# EAGLE board low_level_contoller_board (EAGLE 9.0.0)
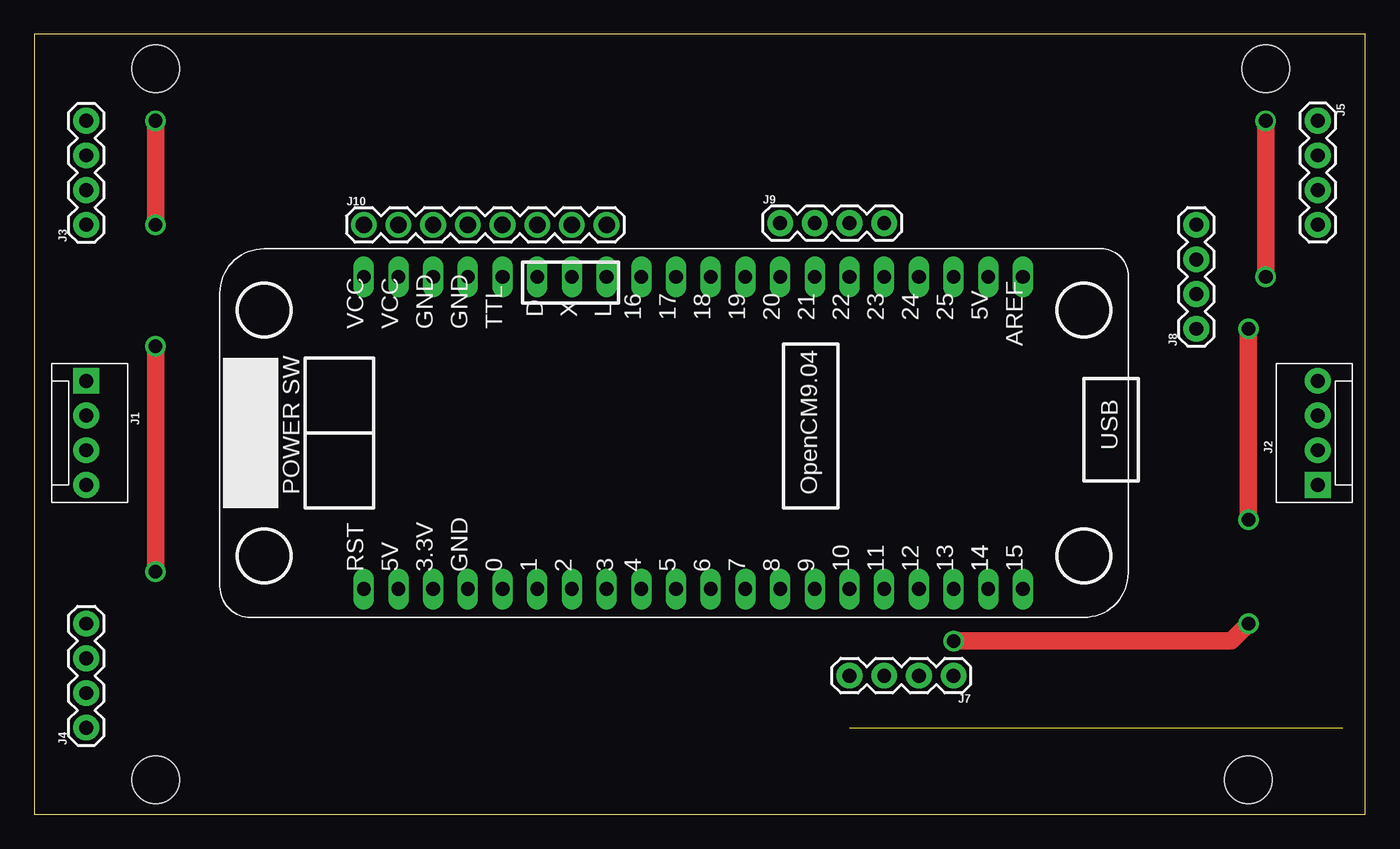
[diagram p0: board, top side]
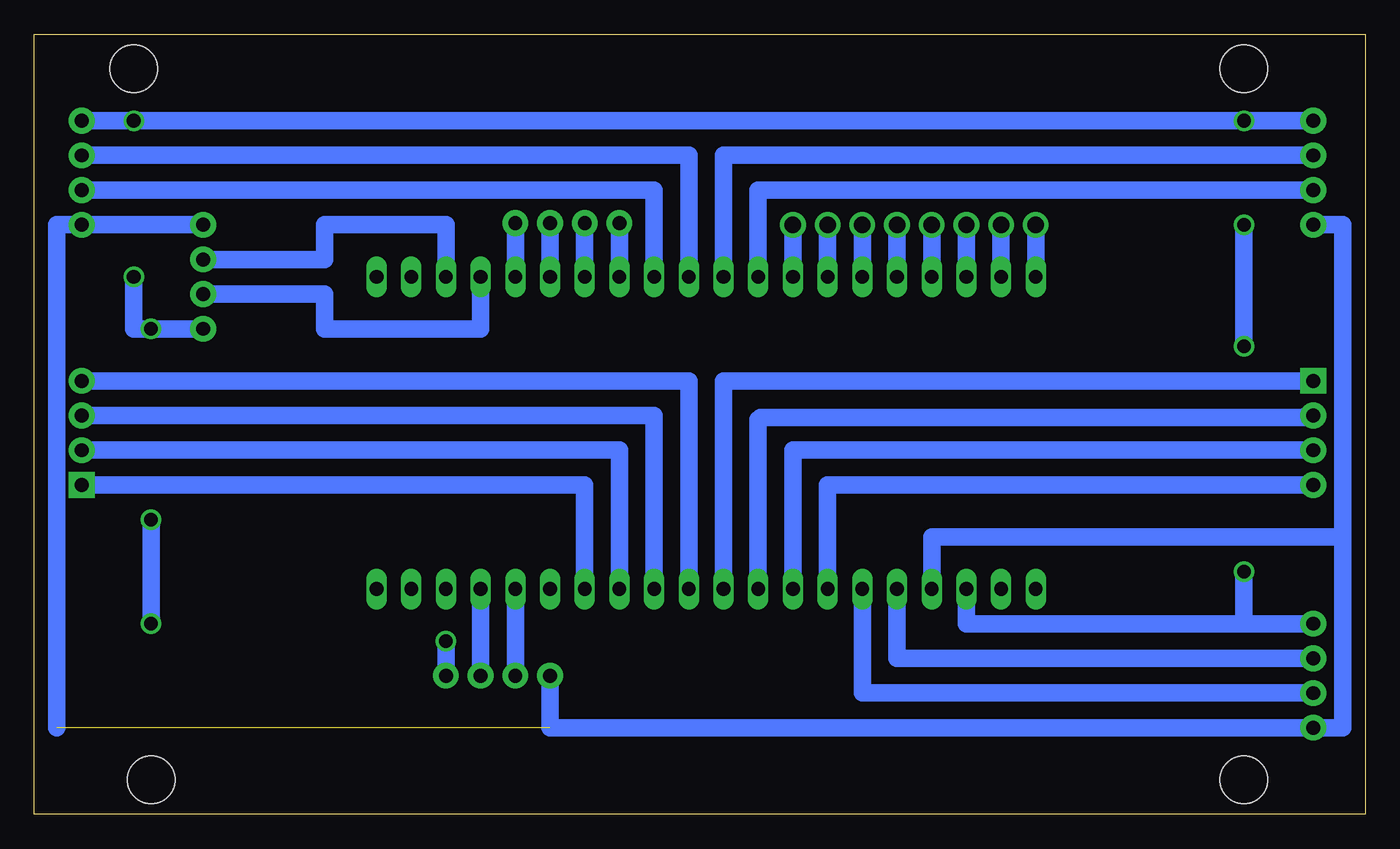
[diagram p1: board, bottom side, seen from below]

Size 97.46 x 57.14 mm. Coordinates in mm from the lower left corner, seen from the top.
Outline: 0,0 97.46,0 97.46,57.14 0,57.14 0,0
Copper layers (1*16): Top 0.035mm / dielectric 1.5mm / Bottom 0.035mm
Design rules "default": minimum track width 6mil, minimum drill 0.35mm, track to track 6mil, track to pad 6mil, pad to pad 6mil, via to via 6mil, smd to smd 6mil, copper to edge 40mil, drill to drill 6mil, minimum pad ring 10mil, minimum via ring 8mil, stop-mask expansion 4mil, vias tented up to drill 0mil, thermal gap 10mil
Holes 3.5 mm at 8.89,2.54 88.9,2.54 90.17,54.61 8.89,54.61

## Footprints (pad centres in the part's own frame; a part is rotated, then mirrored left to right if it is on the bottom)
MOLEX-1X4 = drill 1.016 pad 1.88 square: 1 0,0 | drill 1.016 pad 1.88: 2 2.54,0; 3 5.08,0; 4 7.62,0
1X04 = drill 1.016 pad 1.88: 1 0,0; 2 2.54,0; 3 5.08,0; 4 7.62,0
1X08 = drill 1.2 pad 1.88: 1 0,0; 2 2.54,0; 3 5.08,0; 4 7.62,0; 5 10.16,0; 6 12.7,0; 7 15.24,0; 8 17.78,0
OPENCM9.04 = drill 1 long: 0 -11.43,12.7; 1 -11.43,10.16; 2 -11.43,7.62; 3 -11.43,5.08; 3.3V -11.43,17.78; 4 -11.43,2.54; 5 -11.43,0; 5V -11.43,20.32; 5V2 11.43,-22.86; 6 -11.43,-2.54; 7 -11.43,-5.08; 8 -11.43,-7.62; 9 -11.43,-10.16; 10 -11.43,-12.7; 11 -11.43,-15.24; 12 -11.43,-17.78; 13 -11.43,-20.32; 14 -11.43,-22.86; 15 -11.43,-25.4; 16 11.43,2.54; 17 11.43,0; 18 11.43,-2.54; 19 11.43,-5.08; 20 11.43,-7.62; 21 11.43,-10.16; 22 11.43,-12.7; 23 11.43,-15.24; 24 11.43,-17.78; 25 11.43,-20.32; AREF 11.43,-25.4; D 11.43,10.16; GND -11.43,15.24; GND2 11.43,17.78; GND3 11.43,15.24; L 11.43,5.08; RST -11.43,22.86; TTL 11.43,12.7; VCC 11.43,22.86; VCC2 11.43,20.32; X 11.43,7.62

## Placement (x,y rotation side)
J1  [MOLEX-1X4]  3.81,31.75 270 top
J2  [MOLEX-1X4]  93.98,24.13 90 top
J3  [1X04]  3.81,43.18 90 top
J4  [1X04]  3.81,6.35 90 top
J5  [1X04]  93.98,50.8 270 top
J7  [1X04]  67.31,10.16 180 top
J8  [1X04]  85.09,35.56 90 top
J9  [1X04]  54.61,43.31 0 top
J10  [1X08]  24.13,43.18 0 top
U$1  OPENCM9.04  [OPENCM9.04]  46.99,27.94 90 top

## Library data of the parts
J1 J2 = SparkFun-Connectors; PROD_ID: CONN-08186; SF_ID: PRT-08231
J3-J5 J7-J9 = SparkFun-Connectors; PROD_ID: CONN-09696
J10 = SparkFun-Connectors; PROD_ID: CONN-08438
U$1 = OpenCM9.04

## Nets
+3V3: J3.4 J4.4 J5.1 J7.1 J8.1 U$1.3.3V
GND: J3.1 J4.1 J5.4 J7.4 J8.4 U$1.GND
N$1: J1.4 U$1.2
N$2: J1.3 U$1.3
N$3: J1.2 U$1.4
N$4: J1.1 U$1.5
N$5: J2.4 U$1.6
N$6: J2.3 U$1.7
N$7: J2.2 U$1.8
N$8: J2.1 U$1.9
N$9: J3.2 U$1.16
N$10: J3.3 U$1.17
N$11: J5.2 U$1.18
N$12: J5.3 U$1.19
N$13: J4.3 U$1.0
N$14: J4.2 U$1.1
N$17: J7.3 U$1.11
N$18: J7.2 U$1.12
N$19: J9.1 U$1.20
N$20: J8.3 U$1.25
N$21: J8.2 U$1.24
N$22: J9.2 U$1.21
N$23: J9.3 U$1.22
N$24: J9.4 U$1.23
N$25: J10.1 U$1.VCC
N$26: J10.2 U$1.VCC2
N$27: J10.3 U$1.GND2
N$28: J10.4 U$1.GND3
N$29: J10.5 U$1.TTL
N$30: J10.6 U$1.D
N$31: J10.7 U$1.X
N$32: J10.8 U$1.L

## Tracks (layer width: path | path; a pad name or v marks a point on that pad's centre or on a via)
+3V3  (via drill 1)
  Top 1.27: v8.89,50.8 v8.89,43.18 | v8.89,34.29 v8.89,17.78 | v88.9,35.56 v88.9,21.59 | v88.9,13.97 87.63,12.7 v67.31,12.7 | v90.17,50.8 v90.17,39.37
  Bottom 1.27: J3.4 v8.89,50.8 v90.17,50.8 J5.1 | v8.89,43.18 v8.89,34.29 | J8.1 v88.9,35.56 90.17,35.56 v90.17,39.37 | J7.1 v67.31,12.7 | v88.9,13.97 v88.9,21.59 | U$1.3.3V 29.21,13.97 8.89,13.97 | J4.4 8.89,13.97 | v8.89,17.78 8.89,13.97
GND  (1 unrouted)
  Bottom 1.27: 95.81,6.35 95.81,43.18 J5.4 J8.4 | J3.1 1.65,43.18 1.65,20.32 | 1.65,20.32 1.65,6.35 J4.1 59.69,6.35 J7.4 | U$1.GND 31.75,20.32 1.65,20.32
N$1
  Bottom 1.27: U$1.2 39.37,24.13 J1.4
N$2
  Bottom 1.27: J1.3 41.91,26.67 U$1.3
N$3
  Bottom 1.27: J1.2 4.34,29.21 4.49,29.06 44.3,29.06 44.45,28.91 U$1.4
N$4
  Bottom 1.27: J1.1 46.99,31.75 U$1.5
N$5
  Bottom 1.27: U$1.6 49.53,31.75 J2.4
N$6
  Bottom 1.27: U$1.7 52.07,29.21 J2.3
N$7
  Bottom 1.27: U$1.8 54.61,26.67 J2.2
N$8
  Bottom 1.27: U$1.9 57.15,24.13 J2.1
N$9
  Bottom 1.27: U$1.16 44.45,45.72 J3.2
N$10
  Bottom 1.27: U$1.17 46.99,48.26 J3.3
N$11
  Bottom 1.27: U$1.18 49.53,48.26 J5.2
N$12
  Bottom 1.27: J5.3 52.07,45.72 U$1.19
N$13
  Bottom 1.27: J4.3 34.29,11.43 U$1.0
N$14
  Bottom 1.27: U$1.1 36.83,8.89 J4.2
N$17
  Bottom 1.27: U$1.11 J7.3
N$18
  Bottom 1.27: U$1.12 J7.2
N$19
  Bottom 1.27: J9.1 U$1.20
N$20
  Bottom 1.27: U$1.25 67.31,43.18 76.2,43.18 76.2,40.64 J8.3
N$21
  Bottom 1.27: U$1.24 64.77,35.56 76.2,35.56 76.2,38.1 J8.2
N$22
  Bottom 1.27: U$1.21 J9.2
N$23
  Bottom 1.27: U$1.22 J9.3
N$24
  Bottom 1.27: U$1.23 J9.4
N$25
  Bottom 1.27: J10.1 U$1.VCC
N$26
  Bottom 1.27: J10.2 U$1.VCC2
N$27
  Bottom 1.27: J10.3 U$1.GND2
N$28
  Bottom 1.27: J10.4 U$1.GND3
N$29
  Bottom 1.27: U$1.TTL J10.5
N$30
  Bottom 1.27: U$1.D J10.6
N$31
  Bottom 1.27: U$1.X J10.7
N$32
  Bottom 1.27: J10.8 U$1.L